# EAGLE board MySens-GWeasySensRS485-V01-009 (EAGLE 7.6.0)
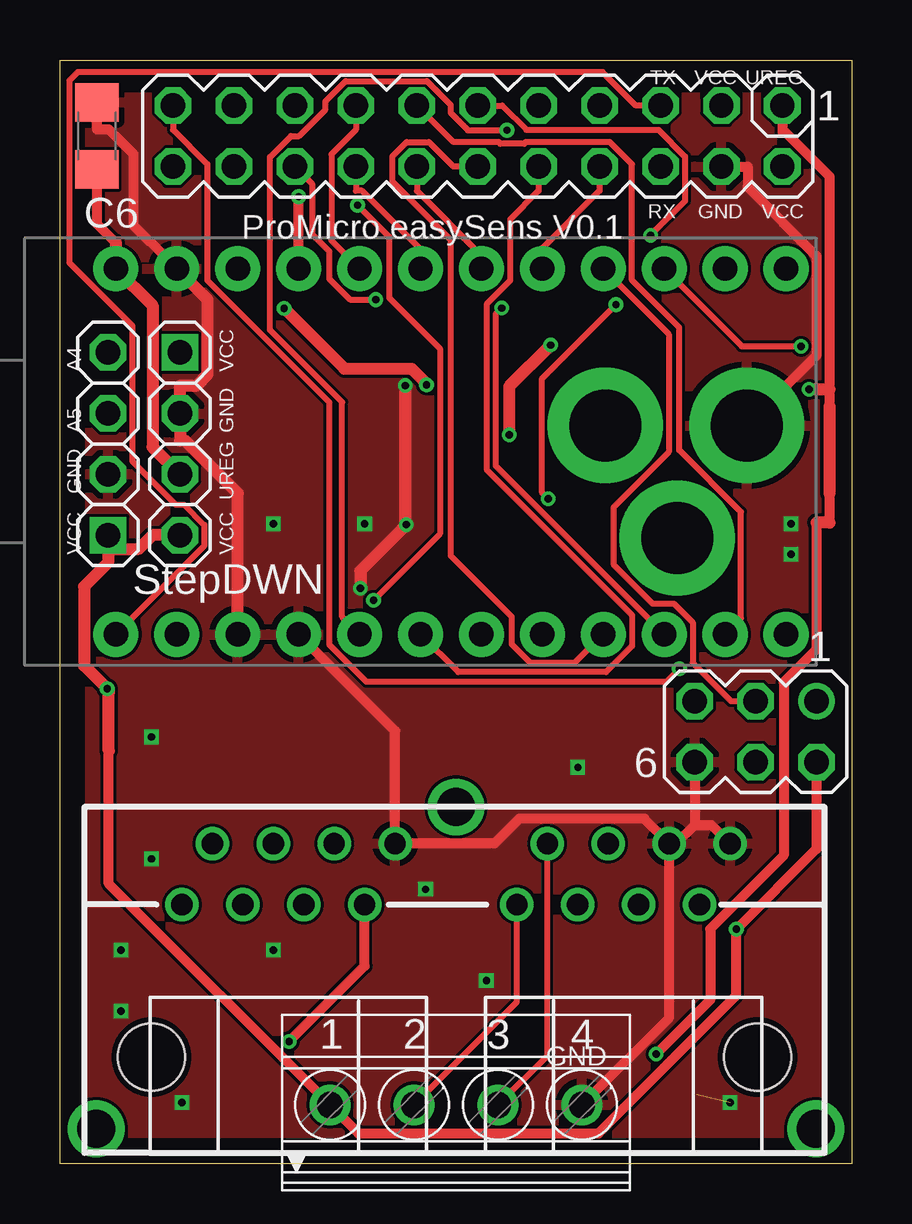
[diagram p0: board, top side]
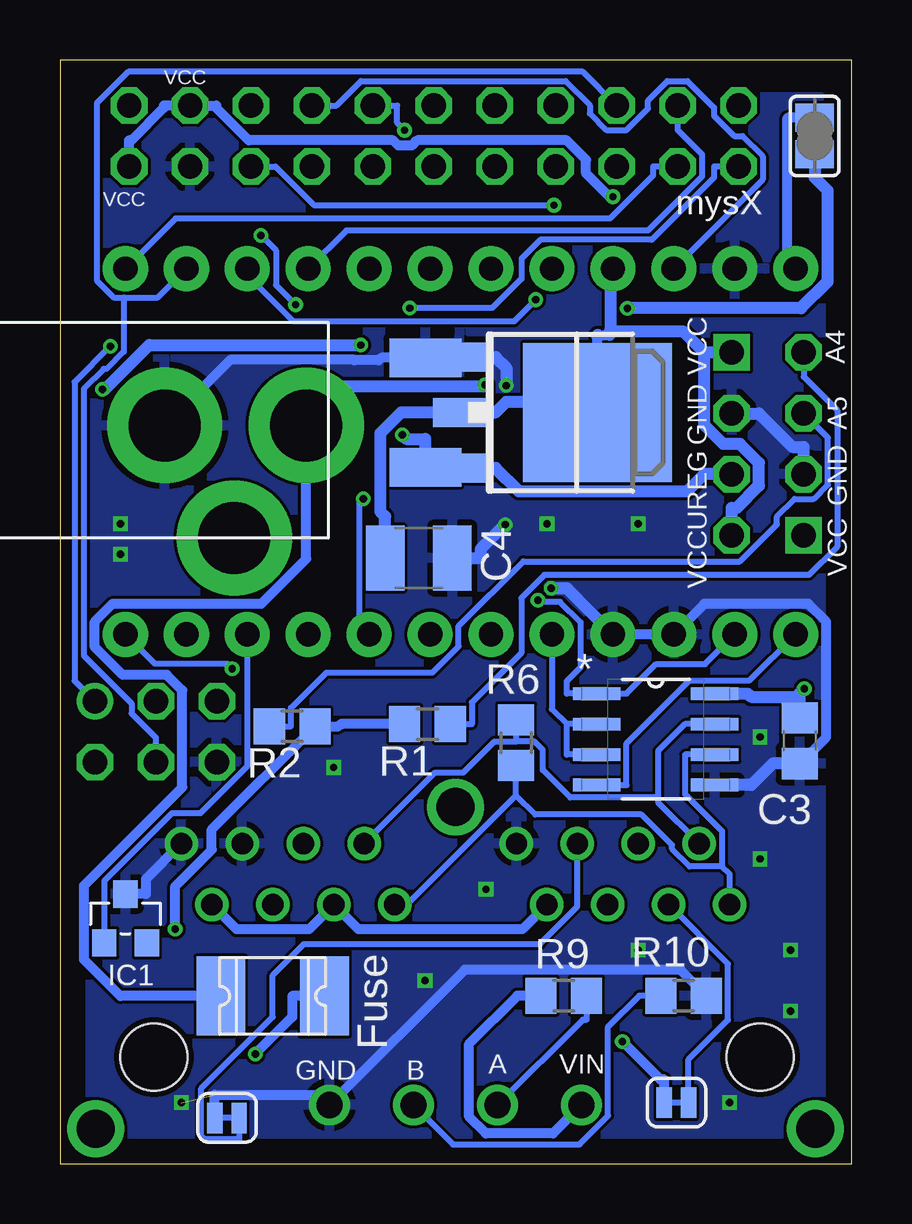
[diagram p1: board, bottom side, seen from below]

Size 33 x 46 mm. Coordinates in mm from the lower left corner, seen from the top.
Outline: 0,0 0,46 33,46 33,0 0,0
Copper layers (1*16): Top 0.035mm / dielectric 1.5mm / Bottom 0.035mm
Design rules "dirt_cheap_dirty_boards.v1": minimum track width 5mil, minimum drill 12mil, track to track 5mil, track to pad 5mil, pad to pad 5mil, via to via 5mil, smd to smd 0mil, copper to edge 10mil, drill to drill 10mil, minimum pad ring 10mil, minimum via ring 6mil, stop-mask expansion 2mil, vias tented up to drill 25mil, thermal gap 10mil
Net classes: 0 default: width 0.254 mm; 1 Power: width 0.508 mm

## Footprints (pad centres in the part's own frame; a part is rotated, then mirrored left to right if it is on the bottom)
SPARKFUN_PRO_MICRO = drill 1.016 pad 1.88: 1 -7.62,12.7; 2 -7.62,10.16; 3 -7.62,7.62; 4 -7.62,5.08; 5 -7.62,2.54; 6 -7.62,0; 7 -7.62,-2.54; 8 -7.62,-5.08; 9 -7.62,-7.62; 10 -7.62,-10.16; 11 -7.62,-12.7; 12 -7.62,-15.24; 13 7.62,-15.24; 14 7.62,-12.7; 15 7.62,-10.16; 16 7.62,-7.62; 17 7.62,-5.08; 18 7.62,-2.54; 19 7.62,0; 20 7.62,2.54; 21 7.62,5.08; 22 7.62,7.62; 23 7.62,10.16; 24 7.62,12.7
C0805 = smd 1.3 x 1.5: 1 -0.95,0; 2 0.95,0
C1210 = smd 1.6 x 2.7: 1 -1.4,0; 2 1.4,0
C1206 = smd 1.6 x 1.8: 1 -1.4,0; 2 1.4,0
1812L = smd 2.03 x 3.3: P$1 -2.16,0; P$2 2.16,0
SOT23 = smd 1.016 x 1.143: 1 -0.889,-1.016; 2 0.889,-1.016; 3 0,1.016
DPACK = smd 1.6 x 3: 1 -2.28,-4.8; 3 2.28,-4.8 | smd 5.8 x 6.2: 4 0,2.38
SOT223 = smd 1.219 x 2.235: 1 -2.311,-3.099; 2 0,-3.099; 3 2.311,-3.099 | smd 3.6 x 2.2: TAB 0,3.099
RJ45_2X_NARROW_SHILDPINS_NOCASE = drill 0.889: 1-1 -11.43,6.35; 1-2 -10.16,8.89; 1-3 -8.89,6.35; 1-4 -7.62,8.89; 1-5 -6.35,6.35; 1-6 -5.08,8.89; 1-7 -3.81,6.35; 1-8 -2.54,8.89; 2-1 2.54,6.35; 2-2 3.81,8.89; 2-3 5.08,6.35; 2-4 6.35,8.89; 2-5 7.62,6.35; 2-6 8.89,8.89; 2-7 10.16,6.35; 2-8 11.43,8.89 | drill 1.575 pad 2.184: G1 -15,-3; G2 0,10.414; G3 15,-3 | hole 2.8: -12.7,0; 12.573,0
SMT-JUMPER_2_NC_TRACE_SILK = smd 0.635 x 1.27: 1 -0.508,0; 2 0.508,0
1X04-S = drill 1.016 square: 1 -3.81,0 | drill 1.016 octagon: 2 -1.27,0; 3 1.27,0; 4 3.81,0
R0805 = smd 1.3 x 1.5: 1 -0.95,0; 2 0.95,0
SJ = smd 1.168 x 1.6: 1 -0.762,0; 2 0.762,0
SOIC127P600X175-8N = smd 1.981 x 0.533: 1 -2.464,1.905; 2 -2.464,0.635; 3 -2.464,-0.635; 4 -2.464,-1.905; 5 2.464,-1.905; 6 2.464,-0.635; 7 2.464,0.635; 8 2.464,1.905
MA03-2 = drill 1.016: 1 -2.54,-1.27 | drill 1.016 octagon: 2 -2.54,1.27; 3 0,-1.27; 4 0,1.27; 5 2.54,-1.27; 6 2.54,1.27
MA11-2 = drill 1.016 octagon: 1 -12.7,-1.27; 2 -12.7,1.27; 3 -10.16,-1.27; 4 -10.16,1.27; 5 -7.62,-1.27; 6 -7.62,1.27; 7 -5.08,-1.27; 8 -5.08,1.27; 9 -2.54,-1.27; 10 -2.54,1.27; 11 0,-1.27; 12 0,1.27; 13 2.54,-1.27; 14 2.54,1.27; 15 5.08,-1.27; 16 5.08,1.27; 17 7.62,-1.27; 18 7.62,1.27; 19 10.16,-1.27; 20 10.16,1.27; 21 12.7,-1.27; 22 12.7,1.27
PJ-102A = drill 3 pad 4.8: RING 0.1,-3.39; RING_SW -4.6,-6.29; TIP 0.1,-9.29
1751264 = drill 1.1 pad 1.7: 1 -5.25,-0.1; 2 -1.75,-0.1; 3 1.75,-0.1; 4 5.25,-0.1

## Placement (x,y rotation side)
B1  SPARKFUN_PRO_MICRO  [SPARKFUN_PRO_MICRO]  15.03,29.68 90 top
C3  22p  [C0805]  2.16,17.62 90 bottom
C4  10uF  [C1210]  18.05,25.24 0 bottom
C6  0.1uF  [C1206]  1.54,42.83 90 top
F2  1812L  [1812L]  24.13,6.99 180 bottom
IC1  ATSHA204A  [SOT23]  30.27,10.21 0 bottom
IC2  LD117ADT50TR  [DPACK]  12.97,31.3 270 bottom
IC6  LM1117MPX-ADJ  [SOT223]  13.24,31.3 270 bottom
J4  [RJ45_2X_NARROW_SHILDPINS_NOCASE]  16.51,4.45 0 top
JP1  JUMPER-SMT_2_NC_TRACE_SILK  [SMT-JUMPER_2_NC_TRACE_SILK]  7.3,2.54 180 bottom
JP3  JUMPER-SMT_2_NC_TRACE_SILK  [SMT-JUMPER_2_NC_TRACE_SILK]  26.04,1.91 180 bottom
JP10  [1X04-S]  2,30 90 top
R1  10K  [R0805]  17.68,18.32 0 bottom
R2  10K  [R0805]  23.32,18.23 180 bottom
R6  150R  [R0805]  13.98,17.54 90 bottom
R9  330R  [R0805]  12,7 0 bottom
R10  330R  [R0805]  7,7 0 bottom
RAW1  [SJ]  1.54,42.83 90 bottom
RS1  MAX487ECSA+  [SOIC127P600X175-8N]  8.16,17.68 0 bottom
STEPDWN  [1X04-S]  5,30 270 top
SV1  [MA03-2]  29,18 180 top
SV2  [MA11-2]  17.41,42.83 180 top
U$3  2.1MMJACKTHM  [PJ-102A]  32.02,30.67 90 bottom
X4  1751264  [1751264]  16.51,2.54 0 top

## Library data of the parts
B1 = SparkFun-Boards
C3 C4 C6 R1 R2 R6 R9 R10 = rcl
F2 = ptc-littlefuse
IC1 = Sensor
IC2 = v-reg
IC6 = lm1117
J4 = RJ45
JP1 JP3 = SparkFun-Jumpers
JP10 STEPDWN = pinhead-2
RAW1 = jumper
RS1 = Maxim_By_element14_Batch_1; MPN: MAX487ECSA+; OC_FARNELL: 9724532; OC_NEWARK: 68K4803; PACKAGE: SOIC-8; SUPPLIER: Maxim
SV1 = con-lstb; OC_FARNELL: unknown; OC_NEWARK: unknown
SV2 = con-Pinheader; OC_FARNELL: unknown; OC_NEWARK: unknown
U$3 = adafruit
X4 = con-phoenix-350; MPN: 1751264; OC_FARNELL: unknown; OC_NEWARK: 10R0934

## Nets
1: J4.1-3 JP1.1
2: J4.1-6 JP3.1
3V3: IC1.2
4: J4.1-4
5: J4.1-5
A: J4.1-1 J4.2-1 R6.1 R9.2 RS1.6 X4.2
A0: B1.17 SV2.8
A1: B1.18 SV2.14
A2: B1.19 SV2.16
A3: B1.20 SV2.15
A4: JP10.4 R1.2
A5: JP10.3 R2.2
B: J4.1-2 J4.2-2 R6.2 R10.1 RS1.7 X4.3
D2: B1.5 RS1.2 RS1.3 SV2.9
D3: B1.6 SV2.10
D4: B1.7
D5: B1.8 SV2.11
D6: B1.9 SV2.12
D7: B1.10 IC1.1 SV2.22
D8: B1.11 SV2.13
D9: B1.12 SV2.21
D10_SS: B1.13 SV2.20
D11_MOSI: B1.14 SV1.4 SV2.17
D12_MISO: B1.15 SV1.1 SV2.18
D13_SCK: B1.16 SV1.3 SV2.19
GND [Power]: B1.3 B1.4 B1.23 C3.1 C4.2 C6.2 IC1.3 IC2.1 IC6.1 J4.1-8 J4.2-6 J4.2-8 JP3.2 JP10.2 R10.2 RS1.5 STEPDWN.2 SV1.6 SV2.4 U$3.RING X4.4
IN [Power]: J4.1-7 J4.2-3 J4.2-7 JP1.2
N$2: J4.2-4
N$3: J4.2-5
RESET: B1.22 SV2.7
RST: SV1.5
RX0: B1.2 RS1.1 SV2.6
TX1: B1.1 RS1.4 SV2.5
UREG [Power]: B1.24 C6.1 F2.P$1 IC2.3 IC6.3 RAW1.2 STEPDWN.3 SV2.1
VCC [Power]: B1.21 C3.2 C4.1 IC2.4 IC6.2 IC6.TAB JP10.1 R1.1 R2.1 R9.1 RS1.8 STEPDWN.1 STEPDWN.4 SV1.2 SV2.2 SV2.3 X4.1
VIN [Power]: F2.P$2 RAW1.1 U$3.TIP

## Tracks (layer width: path | path; a pad name or v marks a point on that pad's centre or on a via)
1
  Bottom 0.254: JP1.1 6.79,4.34 5.15,5.99 5.15,8.32 J4.1-3
2
  Bottom 0.254: JP3.1 25.53,1.02 26.97,1.02 27.11,1.16 27.11,3.13 24.13,6.11 24.13,7.85 22.83,9.15 12.99,9.15 11.43,10.71 J4.1-6
A
  Top 0.254: X4.2 19.05,6.73 J4.2-1
  Bottom 0.254: R9.2 11.05,6 11.2,6 X4.2 | 5.4,12.38 6.74,12.38 7.49,13.12 7.49,13.28 8.76,14.55 13.18,14.55 13.98,15.35 | J4.1-1 5.08,12.06 5.4,12.38 | 5.4,12.38 5.4,13.85 6.95,15.4 6.95,17.05 RS1.6 | 13.98,15.35 R6.1 | J4.2-1 18.54,10.79 13.98,15.35
A0
  Top 0.254: SV2.8 22.5,40.54 20.11,38.16 B1.17
A1
  Top 0.254: B1.18 17.57,37.85 14.88,40.54 SV2.14
A2
  Top 0.254: B1.19 15.03,38.11 12.6,40.54 12.34,40.54 SV2.16
A3
  Top 0.254: B1.20 11.32,38.47 11.32,42.07 12.34,43.08 SV2.15
A4
  Bottom 0.254: JP10.4 2,32.79 0.6,31.4 0.6,25.7 1.77,24.53 12.81,24.53 13.77,23.57 13.77,21.28 15.83,19.22 15.83,18.32 R1.2
A5
  Bottom 0.254: R2.2 23.37,18.23 23.37,18.99 21.89,20.46 17.47,20.46 16.38,21.56 16.38,22.41 13.68,25.1 4.65,25.1 3.11,26.64 3.11,26.96 2.37,27.7 1.58,27.7 0.98,28.3 0.98,30.25 JP10.3
B
  Top 0.254: X4.3 20.32,4.5 J4.2-2
  Bottom 0.254: R10.1 8.85,7 10.15,5.71 10.15,1.99 11.34,0.8 16.62,0.8 X4.3 | 8.07,15.25 11.72,15.25 12.87,16.4 12.87,17.24 13.22,17.59 13.98,17.59 | 8.07,15.25 8.07,15.06 J4.1-2 | 8.07,15.25 8.07,17.19 6.95,18.32 RS1.7 | R6.2 13.98,17.59 | J4.2-2 17.36,16.29 16.18,16.29 14.89,17.59 13.98,17.59
D2  (via drill 0.3 pad 0.61)
  Top 0.254: B1.5 11.76,22.79 11.76,31.73 8.75,34.74 8.75,41.96 9.63,42.83 9.96,42.83 11.06,43.93 11.06,44.27 11.91,45.12 15.3,45.12 16.28,44.13 16.28,43.79 17.01,43.07 v18.64,43.07
  Bottom 0.254: v18.64,43.07 18.94,43.38 18.94,44.1 SV2.9 | RS1.3 11.87,17.05 11.87,18.32 | RS1.2 11.87,18.32 | B1.5 12.49,18.93 11.87,18.32
D3
  Top 0.254: B1.6 16.61,20.48 22.77,20.48 23.85,21.56 23.85,22.86 17.78,28.93 17.78,35.82 18.76,36.8 18.76,39.35 19.95,40.54 SV2.10
D5  (via drill 0.3 pad 0.61)
  Top 0.254: v23.18,35.8 20.07,32.7 20.07,27.99 v20.35,27.71 | SV2.11 18.43,44.1 19.45,43.08 24.95,43.08 26.05,41.98 26.05,40.12 v24.62,38.69
  Bottom 0.254: B1.8 20.5,22.45 20.5,27.57 v20.35,27.71 | v24.62,38.69 24,38.06 24,36.62 v23.18,35.8
D6
  Top 0.254: B1.9 21.45,20.86 19.62,20.86 18.84,21.64 18.84,22.79 16.3,25.33 16.3,38.48 13.86,40.92 13.86,41.98 14.46,42.58 15.38,42.58 16.4,41.56 SV2.12
D7  (via drill 0.3 pad 0.61)
  Top 0.254: v18.41,35.66 18.16,35.41 18.16,29.09 B1.10
  Bottom 0.254: v18.41,35.66 14.98,35.66 13.76,36.88 13.76,37.73 12.97,38.51 8.32,38.51 5.73,41.1 5.73,41.56 SV2.22 | B1.10 25.19,16.56 27.15,14.6 28.34,14.6 31.15,11.78 IC1.1
D8
  Top 0.254: B1.11 28.39,22.72 28.39,27.16 25.82,29.74 25.82,34.85 23.85,36.82 23.85,41.65 22.92,42.58 19.42,42.58 19.36,42.51 18.36,42.51 18.29,42.58 16.4,42.58 SV2.13
D9  (via drill 0.3 pad 0.61)
  Top 0.254: SV2.21 4.71,43.08 6.14,41.66 6.14,36.81 11.22,31.73 11.22,21.64 12.77,20.09 25.3,20.09 v25.82,20.62
  Bottom 0.254: v25.82,20.62 26.03,20.82 29.03,20.82 B1.12
D10_SS
  Bottom 0.254: B1.13 28.18,39.39 10.07,39.39 8.27,41.19 8.27,41.56 SV2.20
D11_MOSI
  Bottom 0.254: 30.34,36.1 30.34,33.84 31.06,33.12 31.18,33.12 32,32.3 32,21.17 30.02,19.18 30.02,18.76 29,17.75 SV1.4 | 30.34,36.1 28.93,36.1 B1.14 | SV2.17 11.2,45.5 30.15,45.5 31.46,44.19 31.46,36.8 30.77,36.1 30.34,36.1
D12_MISO  (via drill 0.3 pad 0.61)
  Top 0.254: B1.15 28.42,34.07 v30.9,34.07 | SV2.18 10.51,40.85 10.51,38.74 11.22,38.03 11.22,36.88 12.09,36.01 v13.16,36.01
  Bottom 0.254: v13.16,36.01 14.07,35.1 23.27,35.1 25.19,37.02 B1.15 | v30.9,34.07 32.39,32.58 32.39,20.12 SV1.1
D13_SCK
  Top 0.254: SV1.3 27.98,19.27 26.38,20.87 26.38,22.56 25.6,23.34 24.71,23.34 23.07,24.97 23.07,27.35 25.38,29.66 25.38,34.57 B1.16
  Bottom 0.254: B1.16 21.06,38.89 8.48,38.89 6.24,41.14 6.24,42.07 7.25,43.08 SV2.19
GND  (via drill 0.3 pad 0.61)  (1 unrouted)
  Top 0.406: U$3.RING 31.54,33.68 31.54,37.83 28.67,40.7 28.67,41.56 SV2.4 | 4.52,37.65 3.07,39.1 3.07,42.07 2.04,43.1 1.54,43.1 C6.2 | SV1.6 26.46,14.11 | 26.46,14.11 27.16,14.11 J4.2-8 | X4.4 25.4,6.08 J4.2-6 | J4.2-6 25.68,13.34 26.46,14.11 | J4.2-6 24.37,14.37 19.15,14.37 18.11,13.34 J4.1-8 13.97,18.04 B1.4
  Top 0.508: v12.53,23.97 12.53,24.71 v14.44,26.63 14.39,26.68 v14.39,32.43 | B1.3 7.41,27.94 5.22,30.13 5,30.13 STEPDWN.2 5,32.41 5.67,32.41 6.14,32.89 6.14,36.03 B1.23 4.52,37.65
  Bottom 0.406: U$3.RING 25.9,33.5 20.75,33.5 20.73,33.48 19.7,33.48 19.6,33.59 IC2.1 17.74,33.62 IC6.1 | R10.2 7.13,8.08 16.12,8.08 X4.4 22.19,2.87 26.54,2.87 JP3.2 | 2.14,16.69 1.06,17.77 1.06,22.59 1.8,23.33 6.14,23.33 B1.3 B1.4 | J4.2-8 29.43,11.85 29.43,11.23 IC1.3
  Bottom 0.508: B1.4 11.86,23.97 v12.53,23.97 | v14.39,32.43 14.39,33.17 14.84,33.62 IC6.1 | v14.44,26.63 15.46,25.61 15.46,25.24 C4.2 | RS1.5 4.19,15.78 3.29,16.67 C3.1 2.14,16.69 | JP10.2 2,29.87 2.46,29.87 3.86,31.27 STEPDWN.2
  other vias: 5.08,2.54 2.54,6.35 2.54,8.89 3.81,12.7 15.24,11.43 27.94,2.54 21.59,16.51 30.48,25.4 30.48,26.67 8.89,26.67 12.7,26.67 3.81,17.78 8.89,8.89 17.78,7.62
  pour Top: 1.27,1.27 1.27,44.45 31.75,44.45 31.75,1.27
  pour Bottom: 1.27,1.27 1.27,44.45 31.75,44.45 31.75,1.27
IN  (via drill 0.3 pad 0.61)
  Top 0.406: v9.55,5.09 12.7,8.23 J4.1-7
  Bottom 0.406: JP1.2 7.81,3.5 7.97,3.5 v9.55,5.09 | J4.1-7 13.73,9.77 20.56,9.77 J4.2-3 22.62,9.77 25.64,9.77 J4.2-7
RESET
  Bottom 0.254: SV2.7 21.48,44.1 20.46,45.12 11.92,45.12 10.91,44.12 10.91,43.77 10.22,43.08 9.38,43.08 8.48,43.97 8.48,44.31 7.68,45.12 6.83,45.12 5.73,44.01 5.73,43.67 4.89,42.83 4.55,42.83 3.7,41.98 3.7,41.01 B1.22
RX0  (via drill 0.3 pad 0.61)
  Top 0.254: v12.41,39.95 13.72,38.63 13.72,36.09 15.84,33.97 15.84,26.25 v13.07,23.48
  Bottom 0.254: v13.07,23.48 13.01,23.41 12.15,23.41 11.29,22.55 11.29,20.69 11.87,20.11 11.87,19.59 RS1.1 9.38,19.59 8.15,20.82 6.11,20.82 B1.2 | SV2.6 24.02,41.56 22.41,39.95 v12.41,39.95
TX1
  Top 0.254: SV2.5 24.02,44.1 22.62,45.5 0.75,45.5 0.39,45.14 0.39,37.55 3.02,34.92 3.02,29.27 4.83,27.46 5.17,27.46 6.02,26.62 6.02,25.75 B1.1
  Bottom 0.254: B1.1 4.25,20.14 6.77,20.14 9.38,17.52 9.38,15.78 RS1.4
UREG  (via drill 0.3 pad 0.61)
  Top 0.406: 32.08,31.56 32.08,32.27 32.08,41.15 30.22,43.01 30.11,43.01 SV2.1 | 2.33,37.97 2.33,37.64 | 31.54,26.71 31.54,21.43 30.18,20.07 30.18,12.85 27.11,9.78 27.11,6.81 v24.86,4.56 | 32.08,27.95 32.08,26.71 | C6.1 1.54,39.17 2.33,38.38
  Top 0.508: 32.08,32.27 v31.23,32.27 | v20.46,34.12 18.73,32.38 v18.73,30.38 | STEPDWN.3 3.86,29.87 3.86,35.77 B1.24 2.33,37.64 | 32.08,26.71 31.54,26.71 | 32.08,31.56 32.08,27.95 | 2.33,38.38 2.33,37.97
  Bottom 0.406: B1.24 2.67,37.64 2.67,43.59 RAW1.2 | 17.04,28.99 17.74,28.99 IC2.3 | F2.P$1 23.32,6.99 23.32,6.11 v24.86,4.56
  Bottom 0.508: IC2.3 17.77,30.21 18.55,30.21 v18.73,30.38 | v31.23,32.27 31.13,32.27 29.28,34.12 v20.46,34.12 | 17.04,28.99 IC6.3 14.84,28.99 13.87,28.02 6.85,28.02 6.14,28.73 STEPDWN.3
VCC  (via drill 0.3 pad 0.61)
  Top 0.406: B1.21 v9.95,40.3 | 2.04,19.63 2.04,19.67 | 2.04,17.2 2.04,11.66 X4.1 12.44,1.26 22.45,1.26 28.2,7 v28.2,9.77 31.54,13.11 SV1.2
  Top 0.508: STEPDWN.4 3.86,26.19 3.29,25.62 2,25.62 | 2,25.62 2,25.05 1,24.05 1,20.76 v1.97,19.79 1.97,19.74 2.04,19.67 | JP10.1 2,25.62 | 2.04,17.2 2.04,19.63
  Bottom 0.406: 10.59,31.59 10.59,31.74 | 10.59,31.82 10.59,34.43 | v9.95,40.3 10.09,40.3 11.06,41.28 11.06,41.84 11.88,42.65 18.1,42.65 18.32,42.43 18.89,42.43 19.11,42.65 25.13,42.65 26.48,44 26.48,44.1 SV2.3 28.67,44.1 28.67,44 30.02,42.65 30.11,42.65 SV2.2 | 9.95,34.68 10.03,34.68 10.09,34.68 | 10.59,31.55 IC2.4 IC6.TAB | 10.59,34.53 10.09,34.53 | R9.1 13.93,7 15.95,4.99 15.95,1.96 15.25,1.26 12.44,1.26 X4.1 | v28.2,9.77 28.2,11.56 26.67,13.08 26.67,13.93 R2.1 21.39,18.23 21.3,18.32 R1.1
  Bottom 0.508: 10.59,31.82 10.59,31.74 14.4,31.74 14.84,31.3 IC6.2 18.78,31.3 19.65,30.43 19.65,27.18 19.45,26.97 C4.1 | STEPDWN.4 5,27.33 4.78,27.33 3.86,28.25 3.86,29.2 4.65,30 5.35,30 6.14,30.79 6.14,33.81 | 10.03,34.68 10.03,37.22 B1.21 | 10.59,31.59 10.59,31.55 | 10.09,34.53 10.09,34.68 | 10.59,34.43 10.59,34.53 | 6.14,33.81 7.01,34.68 9.95,34.68 | STEPDWN.1 6.14,33.81 | v1.97,19.79 2.16,19.6 2.16,19.45 | RS1.8 4.33,19.59 4.2,19.45 2.16,19.45 | C3.2 2.16,19.45
VIN  (via drill 0.3 pad 0.61)
  Top 0.508: v9.35,35.65 11.86,33.13 14.66,33.13 15.28,32.51 v15.28,32.46
  Bottom 0.406: 22.73,30.66 U$3.TIP | F2.P$2 30.49,6.99 31.99,8.49 31.99,11.59 27.91,15.68 27.91,19.72 28.55,20.37 30.38,20.37 31.54,21.53 31.54,22.59 30.8,23.34 24.6,23.34 22.73,25.2 22.73,30.56
  Bottom 0.508: U$3.TIP 21.1,32.4 15.34,32.4 v15.28,32.46 | RAW1.1 1.54,41.1 1.01,40.57 1.01,36.75 2.11,35.65 v9.35,35.65 | 22.73,30.56 22.73,30.66

## Text on the board
tNames: TX | VCC | UREG | ProMicro easySens V0.1 | RX | GND | VCC | C6 | A4 | VCC | A5 | GND | GND | UREG | VCC | VCC | StepDWN | GND
bNames: VCC | mysX | VCC | VCC | A4 | GND | A5 | GND | UREG | VCC | VCC | Fuse | VIN | A | B | GND